# Altium PCB Timer.PcbDoc
Units mm, origin at the board's own origin, x right, y up, seen from the top; angles counter-clockwise.
Board outline 42 x 67.75 mm, 2 copper layers (Top Layer, Bottom Layer), stack 1.1 mm thick; 16 components, 18 nets, 71 pads, 0 vias.
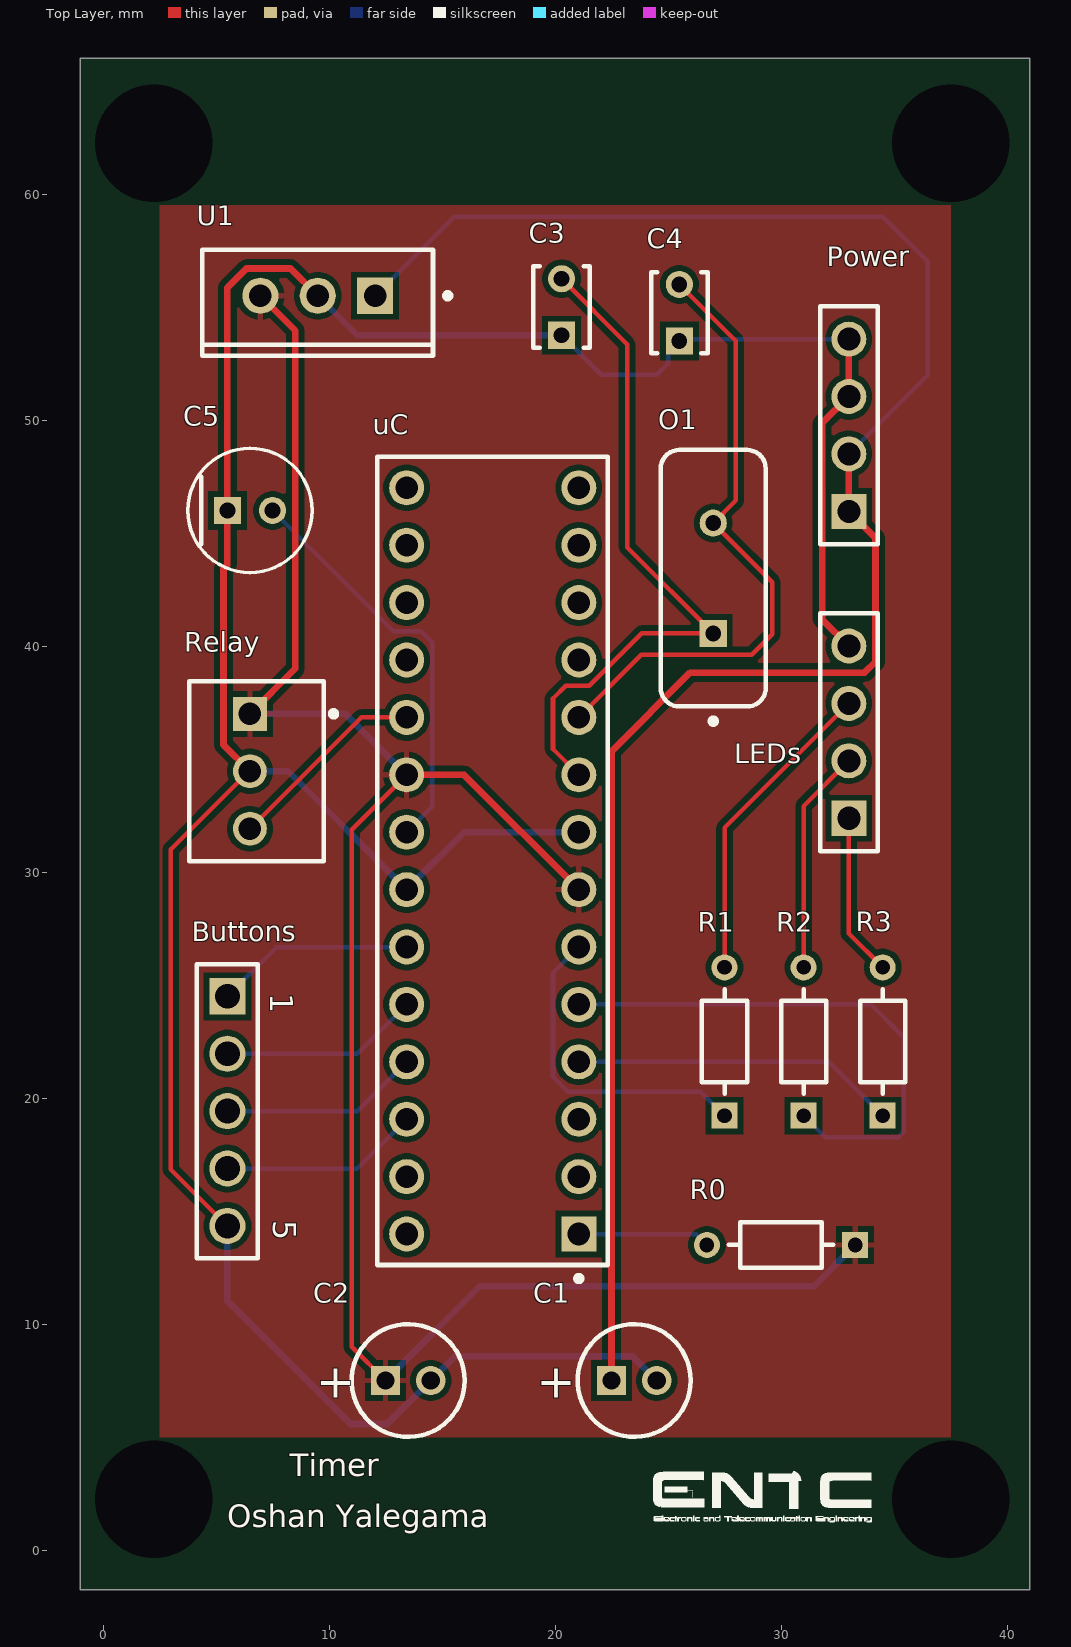
[diagram p0: Top Layer view]
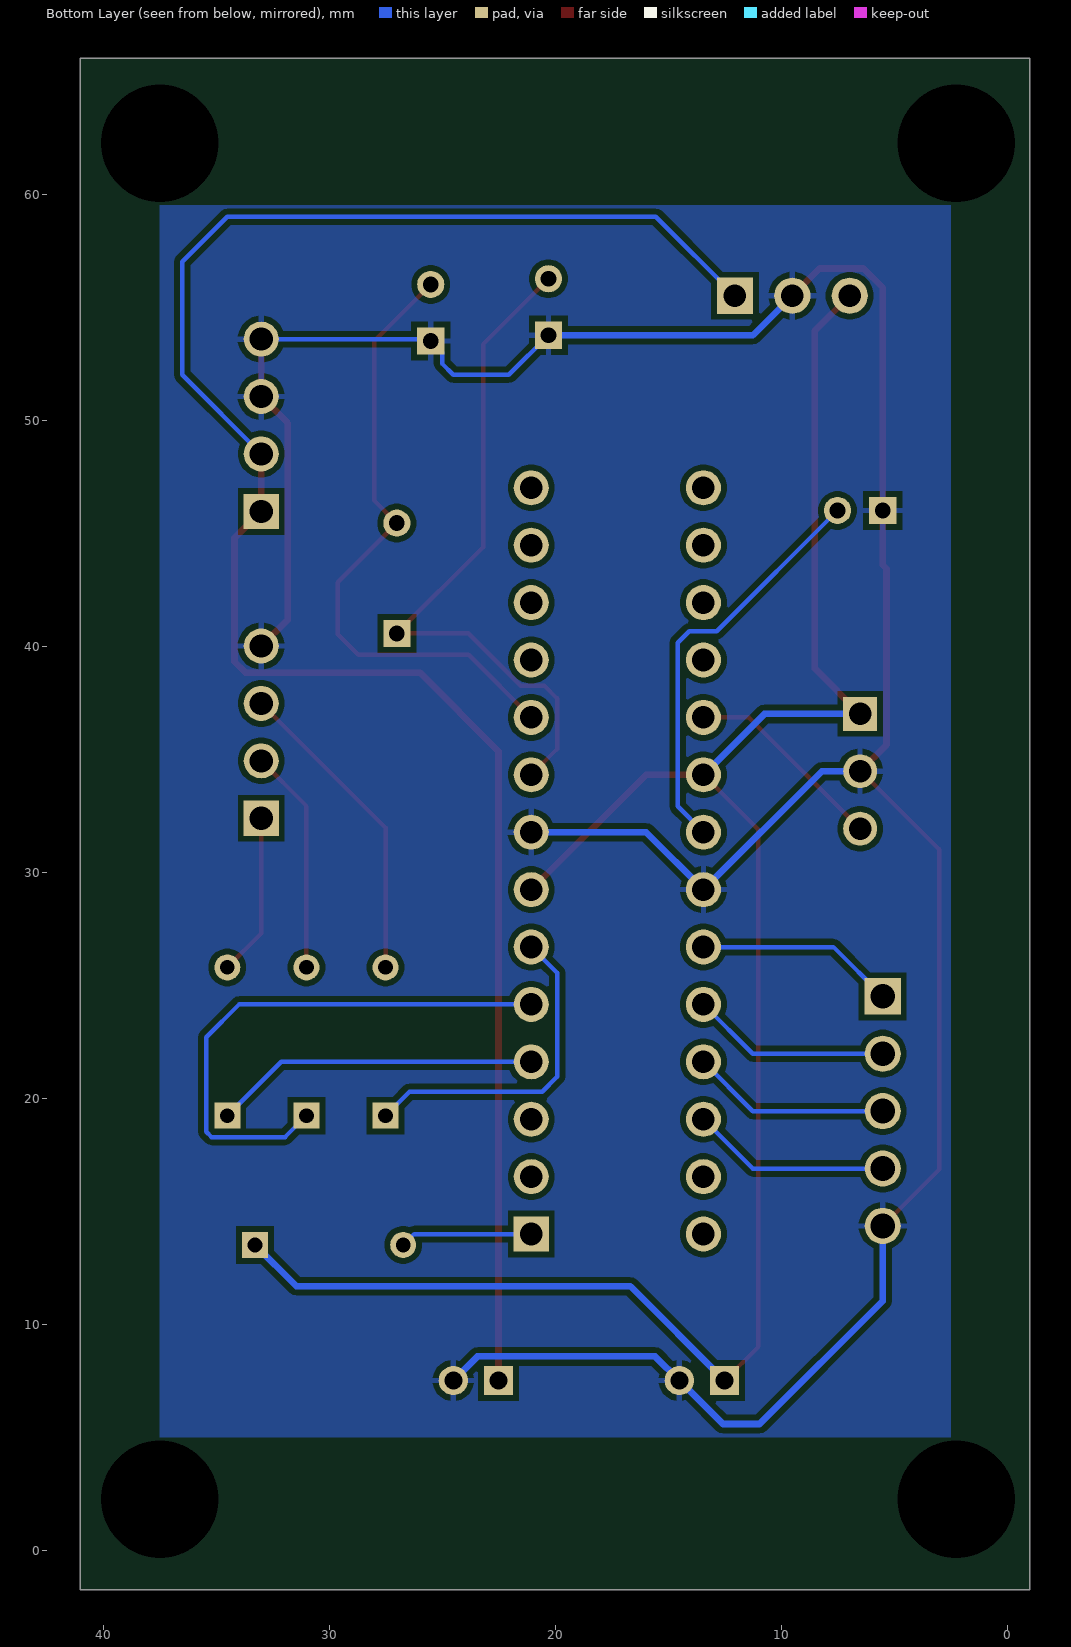
[diagram p1: Bottom Layer view, seen from below]
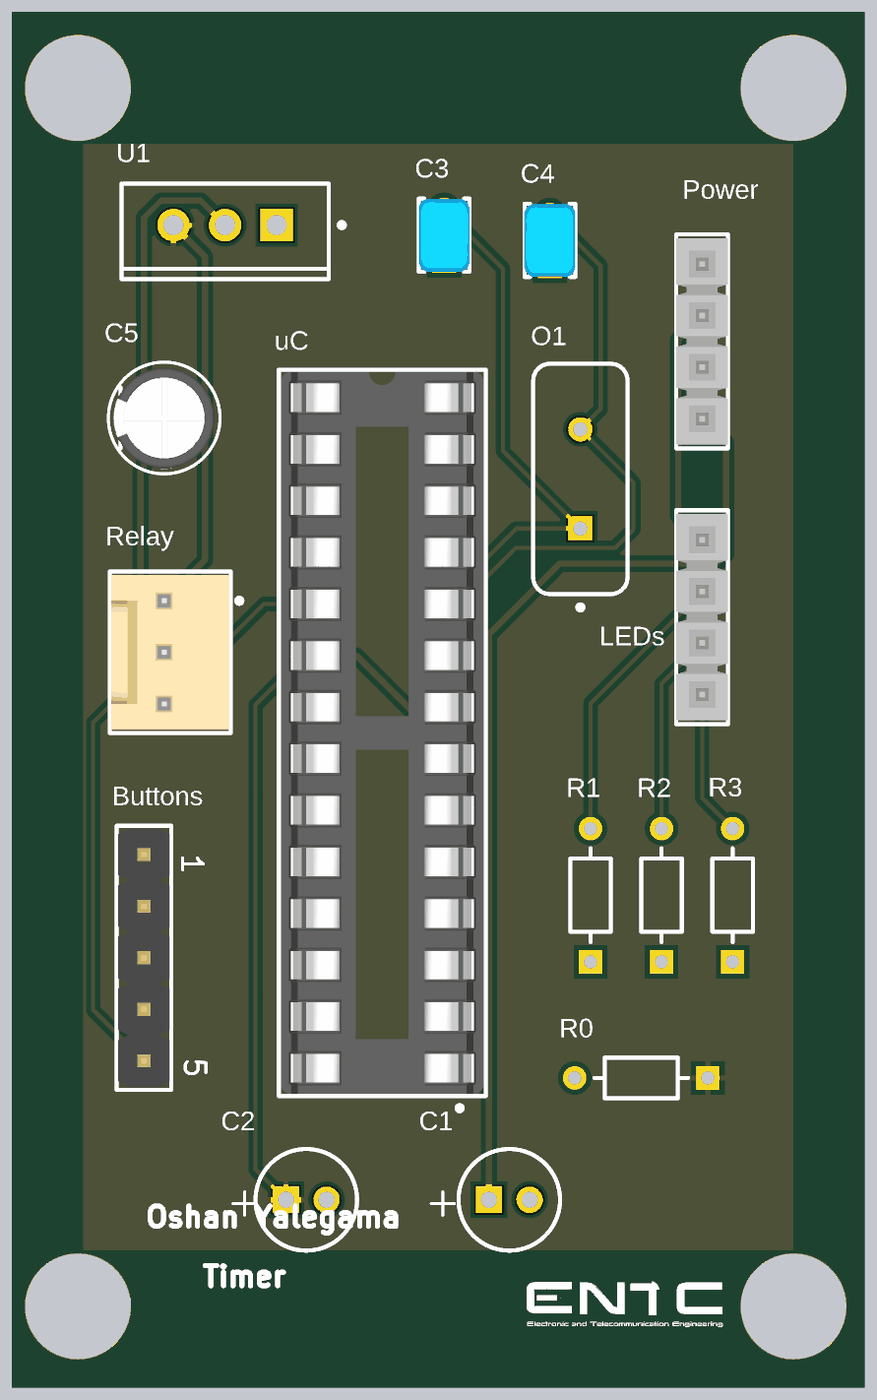
[diagram p2: 3D render of the assembled board from above, using the file's embedded part models]

## Layer stack, top to bottom
Top Solder: solder mask 0.05, SM-001, Dk 4
Top Layer: signal copper 0.1
Dielectric 1: dielectric 0.9, FR-4, Dk 4.8
Bottom Layer: signal copper 0.1
Bottom Solder: solder mask 0.05, SM-001, Dk 4

## Board outline
-1,-1.75 41,-1.75 41,66 -1,66

## Design rules (kind name [scope] priority, off if disabled: settings)
Clearance [All] p1: gap=0.25 ignorepadtopadclearanceinfootprint=FALSE
PolygonConnect [All] p1: connectstyle=Relief reliefconductorwidth=0.254 reliefentries=4 polygonreliefangle="90 Angle" airgapwidth=0.254
RoutingVias [All] p1: holewidth=0.4 width=0.5 viastyle="Through Hole" minholewidth=0.4 minwidth=0.5 maxholewidth=0.4 maxwidth=0.5
SolderMaskExpansion [All] p1: expansion=0.102 istentingtop=FALSE
Width Width_1 [(InNet('+12') OR InNet('+5') OR InNet('GND'))] p1: maxlimit=0.3 minlimit=0.2 preferedwidth=0.3
Width [All] p2: maxlimit=0.2 minlimit=0.1 preferedwidth=0.2
30 further rules are at their usual default settings.

## Components (designator, comment, footprint, x,y, rotation, side; value= is the part's Value field where it differs from the comment)
Buttons "61300511121" 61300511121 5.5,19.42 r270 top
C1 "10uF" CAPPR55-200-1100X500X1200 23.5,7.5 r0 top
C2 "1uF" CAPPR55-200-1100X500X1200 13.5,7.5 r0 top
C3 "22pF" FP-RCE0DB-MFG 20.291,55.002 r90 top
C4 "22pF" FP-RCE0DB-MFG 25.5,54.75 r90 top
C5 "EEUFR1C680B" FP-RAD-TH-D_5_0_5-L_11_1-MFG 6.5,46 r0 top
LEDs "TSW-104-08-G-S" SMTC-TSW-104-08-X-S 33,32.38 r90 top
O1 "60 MHz" FOX-FOXSLF160-20 27,43 r90 top
Power "TSW-104-08-G-S" SMTC-TSW-104-08-X-S 33,45.96 r90 top
R0 "CF18JT2K20" FP-CF18-MFG 30,13.5 r180 top value=2.2kΩ
R1 "CF18JT2K20" FP-CF18-MFG 27.5,22.5 r90 top value=2.2kΩ
R2 "CF18JT2K20" FP-CF18-MFG 31,22.5 r90 top value=2.2kΩ
R3 "CF18JT2K20" FP-CF18-MFG 34.5,22.5 r90 top value=2.2kΩ
Relay "61900311121" 61900311121 6.8,34.46 r90 top
U1 "LM7805CT" FAIR-TO-220-3 9.5,55.5 r270 top
uC "1-2199298-9" FP-1-2199298-9-MFG 17.243,30.491 r90 top

## Footprints (in the part's own frame and the unit in brackets; to place one, negate y for a bottom-side part, rotate by r counter-clockwise, add the part's x,y. Pads: shape width x height; smd on the part's side, far side on the other; paste and mask are expansions set on the pad)
61300511121 [mm] "Pin Header, pitch 2.54 mm, THT, Vertical, single row, 5p"
  rect 1.6x1.6 hole 1.1: 1(-5.08,0)
  round 1.6 hole 1.1: 2(-2.54,0) 3(0,0) 4(2.54,0) 5(5.08,0)
  silkscreen extent -6.5,-1.34 6.5,1.35, body extent -6.35,-1.27 6.35,1.27, height 8.57
61900311121 [mm] "2.54mm Male Locking Header, 3p"
  rect 1.5x1.5 hole 1: 1(2.54,0.3)
  round 1.5 hole 1: 2(0,0.3) 3(-2.54,0.3)
  silkscreen extent -3.98,-3.52 3.98,2.97, body extent -3.81,-2.9 3.81,2.9, height 11.53
CAPPR55-200-1100X500X1200 [mm] "THD, 2-Leads, Dia 5mm, Body Length 11mm"
  rect 1.3x1.3 hole 0.8: 1(-1,0)
  round 1.3 hole 0.8: 2(1,0)
  silkscreen extent -2.5,-2.5 2.5,2.5, body extent -2.5,-2.5 2.5,2.5, height 12
FAIR-TO-220-3 [mm] "FM, 3-Leads, Body 10.2x4.7mm, Pitch 2.54mm"
  rect 1.6x1.6 hole 1: 1(0,2.54)
  round 1.6 hole 1: 2(0,0) 3(0,-2.54)
  silkscreen extent -2.04,-5.1 2.66,5.88, body extent -2.04,-5.1 2.66,5.1, height 18.95
FOX-FOXSLF160-20 [mm] "THD, 2-Leads, Body 11.35x4.65mm"
  rect 1.2x1.2 hole 0.7: 1(-2.44,0)
  round 1.2 hole 0.7: 2(2.44,0)
  silkscreen extent -6.45,-2.33 5.68,2.33, body extent -5.67,-2.32 5.68,2.33, height 3.6
FP-1-2199298-9-MFG [mm]
  rect 1.55x1.55 hole 1 paste-1000 mask+0: 1(-16.51,-3.81)
  round 1.55 hole 1 paste-1000 mask+0: 2(-13.97,-3.81) 3(-11.43,-3.81) 4(-8.89,-3.81) 5(-6.35,-3.81) 6(-3.81,-3.81) 7(-1.27,-3.81) 8(1.27,-3.81) 9(3.81,-3.81) 10(6.35,-3.81) 11(8.89,-3.81) 12(11.43,-3.81) 13(13.97,-3.81) 14(16.51,-3.81) 15(16.51,3.81) 16(13.97,3.81) 17(11.43,3.81) 18(8.89,3.81) 19(6.35,3.81) 20(3.81,3.81) 21(1.27,3.81) 22(-1.27,3.81) 23(-3.81,3.81) 24(-6.35,3.81) 25(-8.89,3.81) 26(-11.43,3.81) 27(-13.97,3.81) 28(-16.51,3.81)
  silkscreen extent -18.6,-5.1 17.88,5.1, body extent -17.98,-5.2 17.98,5.2, height 0.25
FP-CF18-MFG [mm]
  rect 1.15x1.15 hole 0.65 paste-1000 mask+0: 1(-3.28,0)
  round 1.15 hole 0.65 paste-1000 mask+0: 2(3.28,0)
  silkscreen extent -2.3,-1 2.31,1
FP-RAD-TH-D_5_0_5-L_11_1-MFG [mm]
  rect 1.2x1.2 hole 0.7 paste-1000 mask+0: 1(-1,0)
  round 1.2 hole 0.7 paste-1000 mask+0: 2(1,0)
  silkscreen extent -2.75,-2.75 2.75,2.75, body extent -2.85,-2.85 2.85,2.85, height 0.25
FP-RCE0DB-MFG [mm]
  rect 1.2x1.2 hole 0.7 paste-1000 mask+0: 1(-1.25,0)
  round 1.2 hole 0.7 paste-1000 mask+0: 2(1.25,0)
  silkscreen extent -1.8,-1.25 1.8,1.25, body extent -1.95,-1.35 1.95,1.35, height 0.25
SMTC-TSW-104-08-X-S [mm] ".025 SQ Post Terminal Strip Assembly, 1x4 Pins, Vertical, 2.54mm Pitch, Male"
  rect 1.55x1.55 hole 1.02: 1(0,0)
  round 1.55 hole 1.02: 2(2.54,0) 3(5.08,0) 4(7.62,0)
  silkscreen extent -1.46,-1.27 9.08,1.27, body extent -1.27,-1.27 8.89,1.27, height 8.38

## Part data
Buttons: library part CMP-1502-01068-1, "THT Vertical Pin Header WR-PHD, Pitch 2.54 mm, Single Row, 5 pins", Contact Resistance=20mOhm, Manufacturer="Wurth Elektronik", Operating temperature=-40to105degC, Rated Current=3A, Withstanding Voltage=500VAC, Working Voltage=250VAC, Datasheet URL=https://katalog.we-online.de/em/datasheet/6130xx11121.pdf, Gender=Male, Manufacturer URL=http://www.we-online.de, Mounting Technology=THT, Orientation=Vertical, Package Reference=61300511121, Packaging=Bag, Part Number=61300511121, Pin Number=5, Pitch=2.54mm, Publisher=WurthElektronik, Row Number=Single
C1: library part CMP-1665-00038-2, "Aluminum Electrolytic Capacitor, 10 uF, +/- 20%, 50 V, -40 to 85 degC, 2-Pin THD, RoHS, Bulk", Case/Package=Radial, Dielectric Material=Aluminium, Leakage Current=3uA, Manufacturer=Panasonic, Max Operating Temperature=85degC, Min Operating Temperature=-40degC, Package Description="2-Pin Radial Lead, Dia 5 mm, Height 12 mm", Package Quantity=200, Package Reference=CAPPR55-200-1100X500X1200, Ripple Current=65mA, Tolerance=20%, Voltage=50V, Capacitance=10uF, Datasheet URL=https://industrial.panasonic.com/cdbs/www-data/pdf/RDF0000/ABA0000C1218.pdf, Datasheet Version="Rev. 05, 10/2016", Diameter=5mm, Dissipation Factor=0.12%, Height=11mm, Height - Seated (Max)=0.472inch, Lead Diameter=0.5mm, Lead Free=LeadFree, Lead Pitch=2mm, Lead/Base Style=Straight, Length=11mm, Life (Hours)=2000Hour, Manufacturer URL=http://www.panasonic.com/, Mount=ThroughHole, Number of Pins=2, Packaging=Bulk, Radiation Hardening=No, REACH SVHC=NoSVHC, Ripple Current (AC)=65mA, RoHSCompliant=true, Termination=Radial, Voltage Rating=50V, Voltage Rating (DC)=50V
C2: library part CMP-1665-00038-2, "Aluminum Electrolytic Capacitor, 10 uF, +/- 20%, 50 V, -40 to 85 degC, 2-Pin THD, RoHS, Bulk", Capacitance=10uF, Case/Package=Radial, Dielectric Material=Aluminium, Leakage Current=3uA, Manufacturer=Panasonic, Max Operating Temperature=85degC, Min Operating Temperature=-40degC, Package Description="2-Pin Radial Lead, Dia 5 mm, Height 12 mm", Package Quantity=200, Package Reference=CAPPR55-200-1100X500X1200, Ripple Current=65mA, Tolerance=20%, Voltage=50V, Datasheet URL=https://industrial.panasonic.com/cdbs/www-data/pdf/RDF0000/ABA0000C1218.pdf, Datasheet Version="Rev. 05, 10/2016", Diameter=5mm, Dissipation Factor=0.12%, Height=11mm, Height - Seated (Max)=0.472inch, Lead Diameter=0.5mm, Lead Free=LeadFree, Lead Pitch=2mm, Lead/Base Style=Straight, Length=11mm, Life (Hours)=2000Hour, Manufacturer URL=http://www.panasonic.com/, Mount=ThroughHole, Number of Pins=2, Packaging=Bulk, Radiation Hardening=No, REACH SVHC=NoSVHC, Ripple Current (AC)=65mA, RoHSCompliant=true, Termination=Radial, Voltage Rating=50V, Voltage Rating (DC)=50V
C3 C4: library part CMP-06035-004895-1, "Cap Ceramic 22pF 50V C0G ±5% Radial 5mm +125°C Automotive Bulk", Case/Package=Radial, Dielectric=C0G, Max Operating Temperature=125°C, Min Operating Temperature=-55°C, Package Quantity=2000, Ratings=AEC-Q200, Resistor Type=Ceramic, Tolerance=5%, Voltage Rating=50V, Capacitance=22pF, Height=3.5mm, Height - Seated (Max)=0.138inch, Lead Diameter=0.5mm, Lead Pitch=0.197inch, Lead/Base Style="Formed Leads", Length=0.142inch, Mount="Through Hole", Packaging="Tape and Reel", Termination=Radial, Voltage Rating (DC)=50V, Width=0.098inch
C5: library part CMP-05427-001672-1, "Aluminum Electrolytic Capacitors (Radial Lead Type) 68uF ±20% 16V", Capacitance=68uF, Case/Package=Radial, ESR (Equivalent Series Resistance)=300mR, Max Operating Temperature=105°C, Min Operating Temperature=-40°C, Package Quantity=2000, Ripple Current=280mA, Tolerance=20%, Voltage Rating=16V, Diameter=5mm, Features="General Purpose", Height=11mm, Height - Seated (Max)=0.433inch, Impedance=300mR, Lead Diameter=0.5mm, Lead Pitch=5mm, Length=11mm, Life (Hours)=5000Hour, Mount="Through Hole", Packaging="Tape and Reel", Polarity=Polar, Radiation Hardening=No, REACH SVHC="No SVHC", RoHS Compliant=Yes, Series=FR, Termination=Radial, Voltage Rating (DC)=16V
LEDs Power: library part CMP-1024-00357-1, "0.025\" SQ Post Header, Through-hole, Vertical, -55 to 125 degC, 2.54 mm Pitch, 4-Pin, Male, RoHS", Manufacturer=Samtec, Temperature Range="-55 to 125 degC", ComponentLink1Description="Manufacturer URL", ComponentLink1URL=http://www.samtec.com, ComponentLink2Description=Datasheet, ComponentLink2URL=http://www.samtec.com/documents/webfiles/pdf/TSW_TH.PDF, ComponentLink3Description="Package Specification", ComponentLink3URL=http://www.samtec.com/documents/webfiles/cpdf/TSW-XXX-XX-XXX-X-XX-XXX-MKT.pdf, DatasheetVersion=F-214, Mounting Technology=Through-hole, Orientation=Vertical, PackageDescription=".025[0.64] SQ. Post Terminal Strip Assembly", PackageReference=TSW-104-08-X-S, PackageVersion="DM, 8/1988", PartNumber=TSW-104-08-G-S, Pitch="2.54 mm", RoHS=True
O1: library part CMP-1749-00003-1, "Resistance Weld Thru-Hole Crystal, 16 MHz, -20 to 70 degC, 2-Pin THD, RoHS, Bulk", Case\Package=Axial, Max Operating Temperature="155 degC", Min Operating Temperature="-55 degC", Package Quantity=200, Power Rating="250 mW", Resistance="221 kohm", Tolerance=1%, Voltage Rating="250 V", ComponentLink1Description="Manufacturer URL", ComponentLink1URL=http://www.foxonline.com/, ComponentLink2Description=Datasheet, ComponentLink2URL=http://www.foxonline.com/pdfs/hc49slf.pdf, DatasheetVersion=Mar-15, Length="0.248 inch", Mount="Through Hole", PackageDescription="2-Pin Through Hole Device, Body 11.35 x 4.65 mm", PackageReference=FOXSLF160-20, Packaging=Bulk, RoHSCompliant=true
R0 R1 R2 R3: library part CMP-26528-000001-1, "RES 2.2K OHM 1/8W 5% CF AXIAL", Manufacturer="Stackpole Electronics Inc", Package=CF18, Power Rating=0.125W, Resistance=2.2kΩ, Temperature="-55°C to +155°C", Temperature Coefficient=0/-400ppm/°C, Temperature Range High=+155°C, Temperature Range Low=-55°C, Tolerance=5%, Voltage Rating=250V, Automotive=No, Category=Res, ComponentLink2Description=Datasheet, ComponentLink2URL=https://www.seielect.com/catalog/sei-cf_cfm.pdf, Composition="Carbon Film", Device Class L1="Passive Components", Device Class L2=Resistors, Device Class L3="Through-Hole Resistors", Digikey Description="RES 2.2K OHM 1/8W 5% CF AXIAL", Height=2mm, Ipc Land Pattern Name=RESAD656W65L360D200, Lead Free=Yes, Manufacturer Part Number=CF18JT2K20, Octopart=https://octopart.com/cf18jt2k20-stackpole+electronics-19205714, RoHS=TRUE, Series=CF
Relay: library part CMP-1502-00585-1, "Male Locking Header WR-WTB, THT, Vertical, pitch 2.54 mm, 1 x 3 position", Contact Resistance=20mOhm, Manufacturer="Wurth Elektronik", Operating temperature=-40to105degC, Working Voltage=250VAC, Datasheet URL=https://katalog.we-online.de/em/datasheet/6190xx11121.pdf, Gender=Male, Manufacturer URL=http://www.we-online.de, Mounting Technology=THT, Orientation=Vertical, Package Reference=61900311121, Packaging=Bag, Part Number=61900311121, Pitch=2.54mm, Position=1x3, Publisher=WurthElektronik
U1: library part CMP-2000-04938-1, "Positive Voltage Regulator, 5 V, 1 A, -40 to 125 degC, 3-Pin TO-220, RoHS, Tube", Manufacturer=FairchildSemiconductor, Maximum Input Voltage=35V, Maximum Output Current=2.2(Typ)A, Maximum Quiescent Current=8mA, Operating temperature=-40to125degC, Output Voltage=5V, Package=3TO-220AB, Package Description="3-Pin Through Hole Device, Body 10 x 4.5 mm, Pitch 2.54 mm", Package Reference=TO-220, Typical Dropout Voltage @ Current=2@1AV, Accuracy=±4%, Category=LinearRegulator, Datasheet URL=https://datasheet.ciiva.com/26904/lm7805ct-26904988.pdf, Datasheet Version=Aug-12, Line Regulation=100mV, Load Regulation=100mV, Manufacturer URL=https://www.fairchildsemi.com/, Mounting=ThroughHole, Number Of Outputs=1, Output Type=Fixed, Package URL=https://www.fairchildsemi.com/package-drawings/TO/TO220B03.pdf, Packaging=Rail/Tube, Polarity=Positive, Rad Hard=No, Type=Linear
uC: library part CMP-03370-000006-1, "CONN IC DIP SOCKET 28POS TIN", Color=Black, Contact Current Rating=1A, Flammability Rating="UL94 V-0", Insulation Resistance=1GR, Max Operating Temperature=105°C, Min Operating Temperature=-40°C, Package Quantity=17, Connector Type=Pin, Contact Material=Bronze, Contact Plating=Tin, Contact Post Length=3inch, Current rating=1A, ELV=Compliant, Housing Material=PBT, Insulation Material=Thermoplastic, Length=1.4inch, Mating Alignment="Yes (With)", Mount="Through Hole", Number of Contacts=28, Number of Poles=28, Number of Positions=28, Number of Rows=2, Orientation=Straight, Packaging=Rail/Tube, Pitch=2.54mm, Radiation Hardening=No, RoHS Compliant=Yes, Row Spacing=0.3inch, Termination="Through Hole"

## Free pads (board coordinates)
  round 1.524 hole 5.2: 3(2.25,62.25) 4(37.5,62.25) 5(2.25,2.25) 6(37.5,2.25)

## Nets (pads, with @x,y where several pads share a name; then routed paths per layer and width w, separated by ;. In a path a pad name is that pad's centre, name@x,y a point inside that pad or via, vN(x,y) a via of type N, cw(c..) or ccw(c..) an arc to the next point about the centre after c; other vN are vias at no path point)
+5: C2.1 R0.1 Relay.1 U1.3 uC.7 uC.20 | length 89.4
  Top Layer w0.2: C2.1 11,9 11,31.868 uC.20
  Top Layer w0.3: Relay.1 8.505,39.005 8.505,53.955 U1.3 ; uC.20 15.973,34.301 uC.7
  Bottom Layer w0.3: Relay.1 10.734,37 uC.20 ; C2.1 16.67,11.67 31.45,11.67 R0.1
+12: C1.1 Power.1 Power.2 U1.1 | length 87.5
  Top Layer w0.3: C1.1 22.5,35.342 25.981,38.822 33.702,38.822 34.185,39.305 34.185,44.775 Power.1 Power.2
  Bottom Layer w0.2: U1.1 15.54,59 34.5,59 36.5,57 36.5,52 Power.2
GND: Buttons.5 C1.2 C2.2 C3.1 C4.1 C5.1 LEDs.4 Power.3 Power.4 Relay.2 U1.2 uC.8 uC.22 | length 133.9
  Top Layer w0.2: Buttons.5 3,16.84 3,31 6.46,34.46 Relay.2
  Top Layer w0.3: Relay.2 5.33,35.63 5.33,43.42 5.5,43.589 C5.1 5.5,55.857 6.346,56.704 8.296,56.704 U1.2 ; LEDs.4 31.823,41.177 31.823,49.863 Power.3 Power.4
  Bottom Layer w0.2: C3.1 22.043,52 24.5,52 25,52.5 25,53 C4.1 25.58,53.58 Power.4
  Bottom Layer w0.3: Buttons.5 5.5,11.022 10.948,5.574 12.574,5.574 C2.2 15.571,8.571 23.429,8.571 C1.2 ; Relay.2 8.194,34.46 uC.22 15.973,31.761 uC.8 ; U1.2 11.248,53.752 C3.1
NetButtons_1: Buttons.1 uC.23 | length 8.8
  Bottom Layer w0.2: Buttons.1 7.681,26.681 uC.23
NetButtons_2: Buttons.2 uC.24 | length 8.8
  Bottom Layer w0.2: Buttons.2 11.252,21.96 uC.24
NetButtons_3: Buttons.3 uC.25 | length 8.8
  Bottom Layer w0.2: Buttons.3 11.252,19.42 uC.25
NetButtons_4: Buttons.4 uC.26 | length 8.8
  Bottom Layer w0.2: Buttons.4 11.252,16.88 uC.26
NetC3_2: C3.2 O1.1 uC.9 | length 30.6
  Top Layer w0.2: C3.2 23.187,53.356 23.187,44.373 O1.1 23.84,40.56 21.518,38.238 20.469,38.238 19.91,37.679 19.91,35.444 uC.9
NetC4_2: C4.2 O1.2 uC.10 | length 28.1
  Top Layer w0.2: uC.10 23.822,39.61 28.701,39.61 29.616,40.524 29.616,42.824 O1.2 28,46.44 28,53.5 C4.2
NetC5_2: C5.2 uC.21 | length 18.4
  Bottom Layer w0.2: C5.2 12.849,40.651 14.068,40.651 14.576,40.143 14.576,32.904 uC.21
NetLEDs_1: LEDs.1 R3.2 | length 7.2
  Top Layer w0.2: LEDs.1 33,27.28 R3.2
NetLEDs_2: LEDs.2 R2.2 | length 10
  Top Layer w0.2: R2.2 31,32.92 LEDs.2
NetLEDs_3: LEDs.3 R1.2 | length 14
  Top Layer w0.2: R1.2 27.5,31.96 LEDs.3
NetR0_2: R0.2 uC.1 | length 5.9
  Bottom Layer w0.2: uC.1 26.239,13.981 R0.2
NetR1_1: R1.1 uC.6 | length 14.5
  Bottom Layer w0.2: uC.6 19.91,25.538 19.91,20.941 20.57,20.28 26.44,20.28 R1.1
NetR2_1: R2.1 uC.5 | length 24.1
  Bottom Layer w0.2: uC.5 33.982,24.141 35.429,22.693 35.429,18.502 35.201,18.274 31.946,18.274 R2.1
NetR3_1: R3.1 uC.4 | length 14.4
  Bottom Layer w0.2: uC.4 32.119,21.601 R3.1
NetRelay_3: Relay.3 uC.19 | length 9
  Top Layer w0.2: Relay.3 11.421,36.841 uC.19
pads on no net: uC.2 uC.3 uC.11 uC.12 uC.13 uC.14 uC.15 uC.16 uC.17 uC.18 uC.27 uC.28

## Polygon pours and split planes (outlines as drawn)
+5 on Top Layer "+5_L01_P002" (solid, remove dead copper, pour order 2): 2.5,5 37.5,5 37.5,59.5 2.5,59.5 2.5,58
GND on Bottom Layer "GND_L02_P003" (solid, remove dead copper, pour order 3): 2.5,59.5 37.5,59.5 37.5,5 2.5,5

## Silkscreen, mask and mechanical layers (free items; w line width, h text height)
Top Overlay:
  drawing of 53 lines, arcs and shapes, not listed
  text "Timer" at 8.254,3.254 h1
  text "Oshan Yalegama" at 5.5,1 h1

## Text inside footprints (layer, text, board x,y; h text height)
Buttons: Top Overlay "5" at 7.532,14.594 h1.02 r270; Top Overlay "1" at 7.405,24.627 h1.02 r270
C1: Top Overlay "+" at 19.198,6.738 h1.5
C2: Top Overlay "+" at 9.436,6.738 h1.5